# EAGLE board pinheader_breakout (EAGLE 7.4.0)
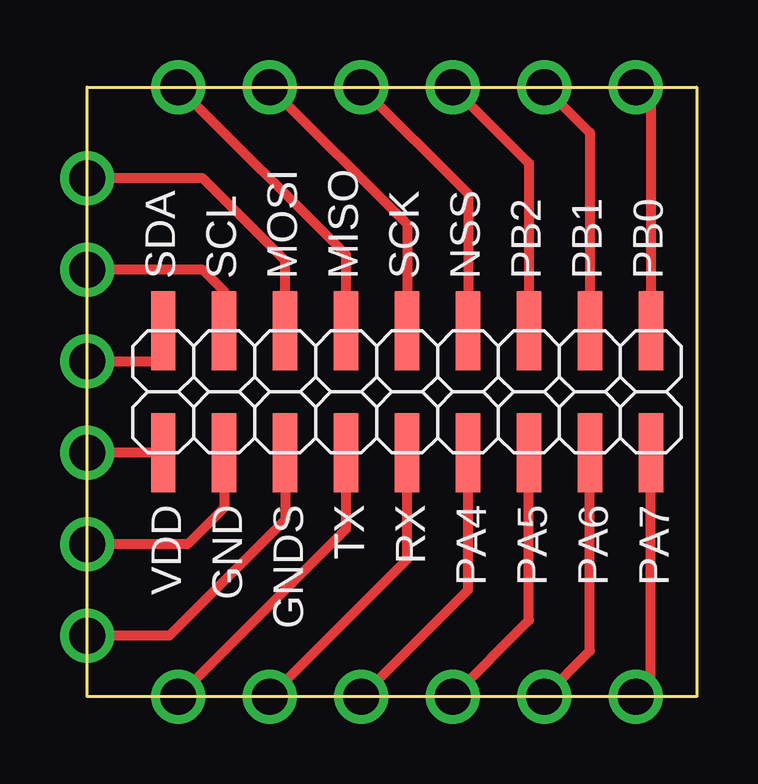
[diagram p0: board, top side]

Size 25.45 x 25.4 mm. Coordinates in mm from the lower left corner, seen from the top.
Outline: 0,0 25.45,0 25.45,25.39 0,25.39 0,0
Copper layers (1*16): Top 0.035mm / dielectric 1.5mm / Bottom 0.035mm
Design rules "default": minimum track width 10mil, minimum drill 24mil, track to track 8mil, track to pad 8mil, pad to pad 8mil, via to via 8mil, smd to smd 8mil, copper to edge 40mil, drill to drill 8mil, minimum pad ring 10mil, minimum via ring 8mil, stop-mask expansion 4mil, vias tented up to drill 0mil, thermal gap 10mil

## Footprints (pad centres in the part's own frame; a part is rotated, then mirrored left to right if it is on the bottom)
2X09SMD = smd 1.016 x 3.302: 1 -1.27,-3.81; 2 -1.27,1.27; 3 1.27,-3.81; 4 1.27,1.27; 5 3.81,-3.81; 6 3.81,1.27; 7 6.35,-3.81; 8 6.35,1.27; 9 8.89,-3.81; 10 8.89,1.27; 11 11.43,-3.81; 12 11.43,1.27; 13 13.97,-3.81; 14 13.97,1.27; 15 16.51,-3.81; 16 16.51,1.27; 17 19.05,-3.81; 18 19.05,1.27
BREAKOUT_V1 = drill 1.5: P$1 3.81,0; P$2 7.62,0; P$3 11.43,0; P$4 15.24,0; P$5 19.05,0; P$6 22.86,0; P$7 22.86,25.4; P$8 19.05,25.4; P$9 15.24,25.4; P$10 11.43,25.4; P$11 7.62,25.4; P$12 3.81,25.4; P$13 0,21.59; P$14 0,17.78; P$15 0,13.97; P$16 0,10.16; P$17 0,6.35; P$18 0,2.54

## Placement (x,y rotation side)
JP1  [2X09SMD]  4.45,13.97 0 top
U$1  BREAKOUT_V1  [BREAKOUT_V1]  0,0 0 top

## Library data of the parts
JP1 = pinhead
U$1 = breakout_base

## Nets
+3V3: JP1.1 U$1.P$16
GND: JP1.3 U$1.P$17
GNDIO: JP1.5 U$1.P$18
MISO: JP1.8 U$1.P$12
MOSI: JP1.6 U$1.P$13
NSS: JP1.12 U$1.P$10
PA4: JP1.11 U$1.P$3
PA5: JP1.13 U$1.P$4
PA6: JP1.15 U$1.P$5
PA7: JP1.17 U$1.P$6
PB0: JP1.18 U$1.P$7
PB1: JP1.16 U$1.P$8
PB2: JP1.14 U$1.P$9
RX: JP1.9 U$1.P$2
SCK: JP1.10 U$1.P$11
SCL: JP1.4 U$1.P$14
SDA: JP1.2 U$1.P$15
TX: JP1.7 U$1.P$1

## Tracks (layer width: path | path; a pad name or v marks a point on that pad's centre or on a via)
+3V3
  Top 0.406: JP1.1 U$1.P$16
GND
  Top 0.406: JP1.3 5.71,7.87 4.19,6.35 U$1.P$17
GNDIO
  Top 0.406: JP1.5 8.26,7.37 3.43,2.54 U$1.P$18
MISO
  Top 0.406: JP1.8 10.79,18.41 U$1.P$12
MOSI
  Top 0.406: JP1.6 8.26,18.16 4.83,21.59 U$1.P$13
NSS
  Top 0.406: U$1.P$10 15.88,20.95 JP1.12
PA4
  Top 0.406: U$1.P$3 15.88,4.45 JP1.11
PA5
  Top 0.406: U$1.P$4 18.41,3.17 JP1.13
PA6
  Top 0.406: U$1.P$5 20.95,1.91 JP1.15
PA7
  Top 0.406: U$1.P$6 23.5,0.64 JP1.17
PB0
  Top 0.406: U$1.P$7 23.5,24.77 JP1.18
PB1
  Top 0.406: U$1.P$8 20.95,23.5 JP1.16
PB2
  Top 0.406: U$1.P$9 18.41,22.23 JP1.14
RX
  Top 0.406: U$1.P$2 13.34,5.71 JP1.9
SCK
  Top 0.406: U$1.P$11 13.34,19.68 JP1.10
SCL
  Top 0.406: JP1.4 5.71,16.89 4.83,17.78 U$1.P$14
SDA
  Top 0.406: U$1.P$15 3.17,13.97 JP1.2
TX
  Top 0.406: U$1.P$1 10.79,6.99 JP1.7

## Text on the board
tNames: SDA | SCL | MOSI | MISO | SCK | NSS | PB2 | PB1 | PB0 | VDD | GND | GNDS | TX | RX | PA4 | PA5 | PA6 | PA7